# Altium PCB Air_PCB.PcbDoc
Units mil, origin at the board's own origin, x right, y up, seen from the top; angles counter-clockwise.
Board outline 824 x 961 mil, 4 copper layers (TopLayer, 3V3, 1V8, Bottom Layer), stack 23.712 mil thick; 12 components, 6 nets, 39 pads, 15 vias.
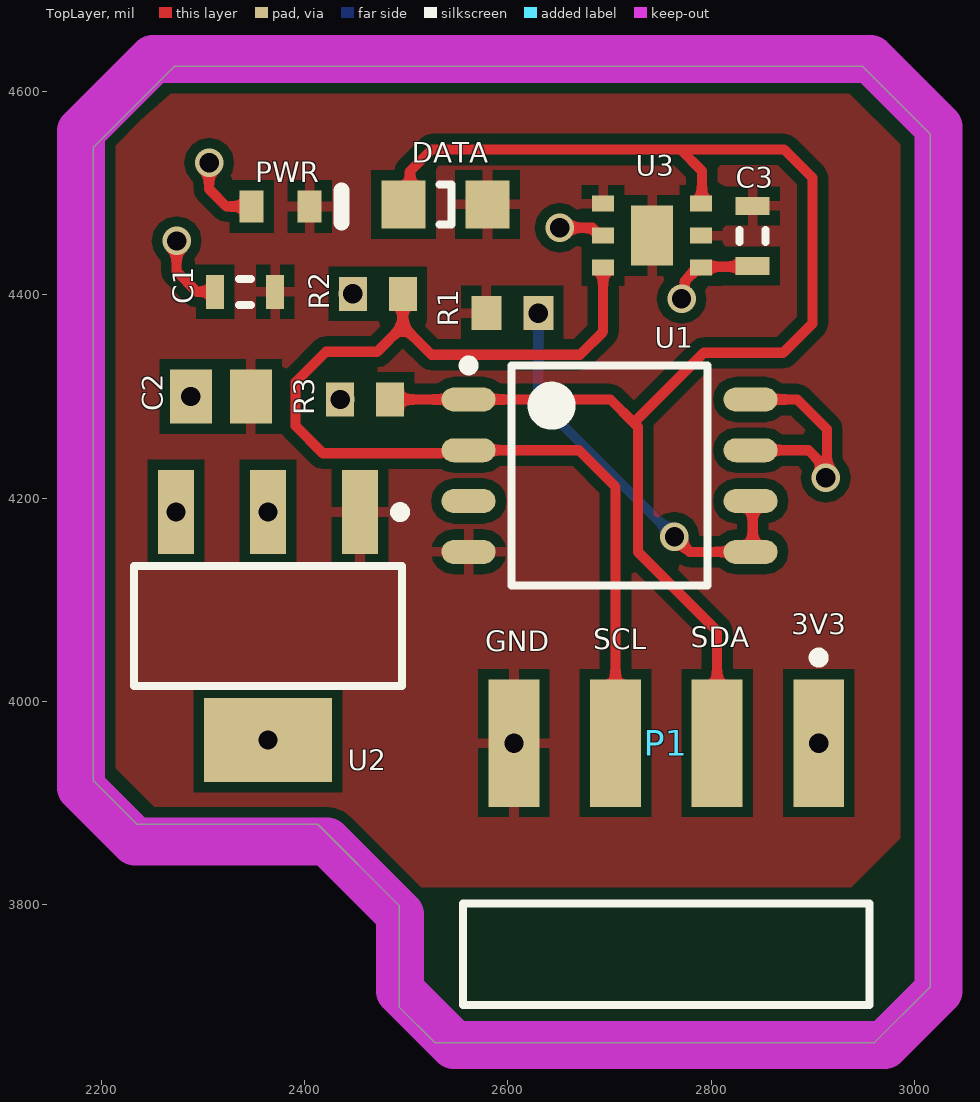
[diagram p0: TopLayer view]
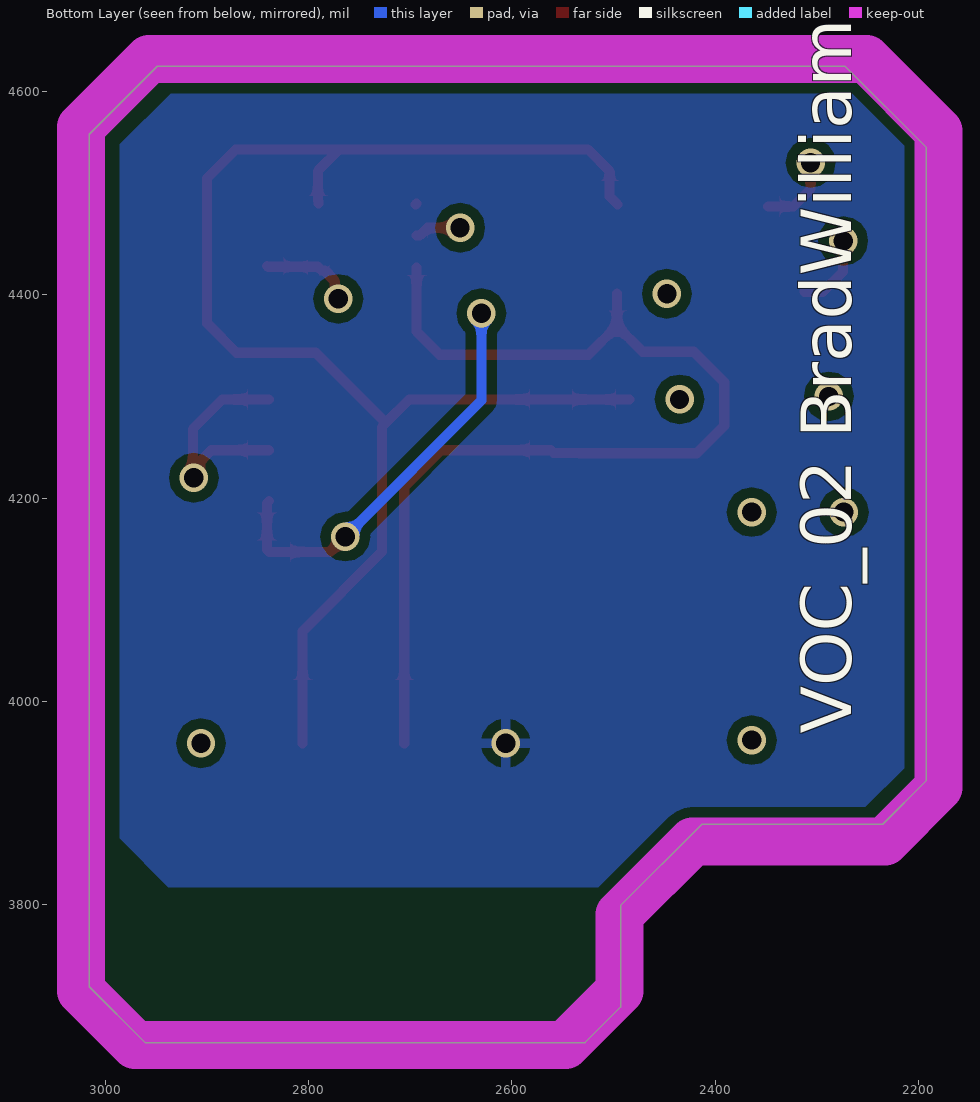
[diagram p1: Bottom Layer view, seen from below]
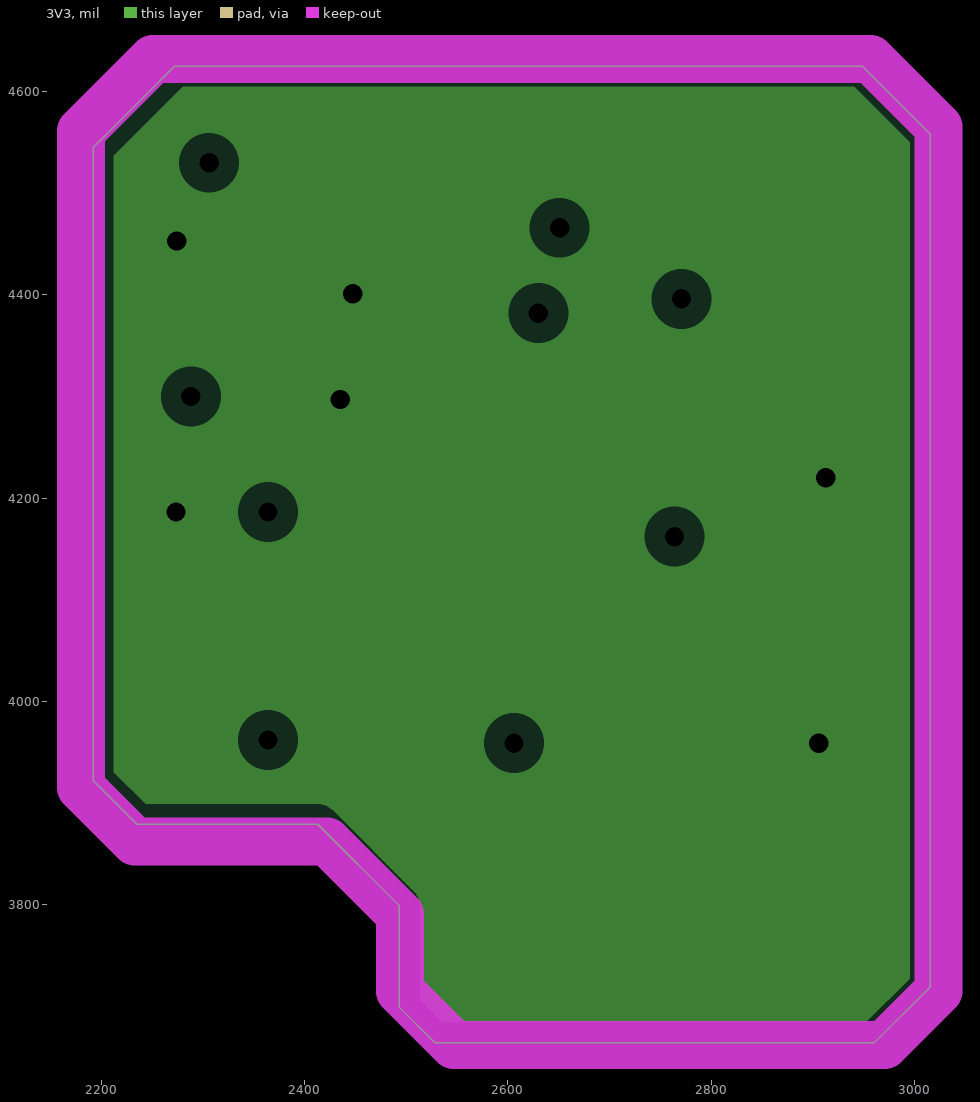
[diagram p2: 3V3, clearances drawn from the general rule]
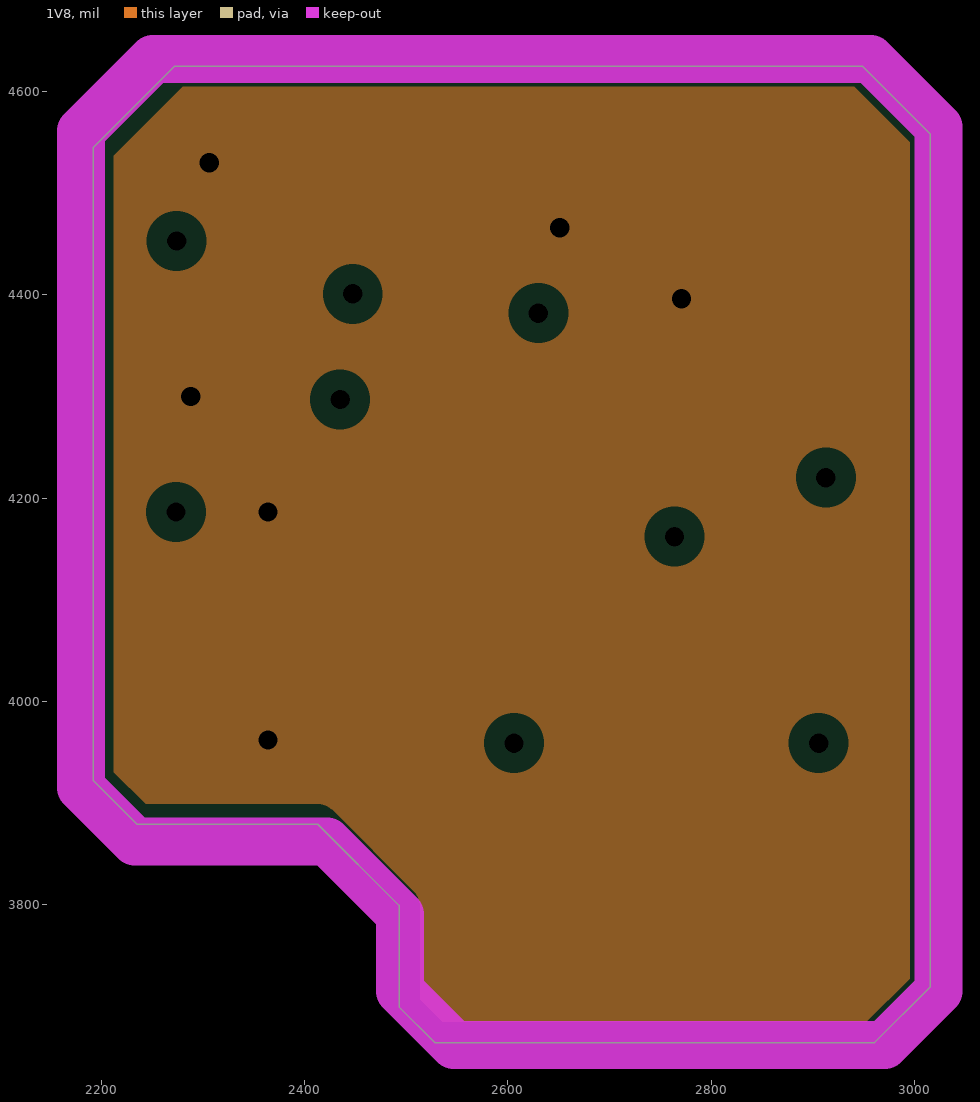
[diagram p3: 1V8, clearances drawn from the general rule]

## Layer stack, top to bottom
Top Solder: solder mask 0.4, Solder Resist, Dk 3.5
TopLayer: signal copper 1.378
Dielectric2: dielectric 12.6, FR-4, Dk 4.8
3V3: plane copper 1.378, net 3V3
Dielectric 3: prepreg 2.8, PP-006, Dk 4.1
1V8: plane copper 1.378, net 1V8
Dielectric 2: prepreg 2.8, PP-006, Dk 4.1
Bottom Layer: signal copper 1.378
Bottom Solder: solder mask 0.4, Solder Resist, Dk 3.5

## Board outline
3016,3719 2961,3664 2528,3664 2493,3699 2493,3799 2413,3879 2235,3879 2192,3922 2192,4545 2272,4625 2949,4625 3016,4558

## Design rules (kind name [scope] priority, off if disabled: settings)
Clearance Clearance_5 [All] p1: gap=10 ignorepadtopadclearanceinfootprint=FALSE except(0: Arc-Hole Track-Hole SMDPad-Hole THPad-Hole Via-Hole Fill-Hole Poly-Hole Region-Hole Text-Hole)
Clearance Clearance_4 [All] p2 off: gap=10 ignorepadtopadclearanceinfootprint=FALSE except(0: Arc-Hole Track-Hole SMDPad-Hole THPad-Hole Via-Hole Fill-Hole Poly-Hole Region-Hole Text-Hole)
Clearance Clearance_3 [All] p3 off: gap=10 ignorepadtopadclearanceinfootprint=FALSE except(0: Arc-Hole Track-Hole SMDPad-Hole THPad-Hole Via-Hole Fill-Hole Poly-Hole Region-Hole Text-Hole)
Clearance [All] p4 off: gap=10 ignorepadtopadclearanceinfootprint=FALSE except(0: Arc-Hole Track-Hole SMDPad-Hole THPad-Hole Via-Hole Fill-Hole Poly-Hole Region-Hole Text-Hole)
Clearance Clearance_2 [All] p5 off: gap=10 ignorepadtopadclearanceinfootprint=FALSE except(0: Arc-Hole Track-Hole SMDPad-Hole THPad-Hole Via-Hole Fill-Hole Poly-Hole Region-Hole Text-Hole; 8: Arc-Arc Arc-Track Track-Track)
Clearance Clearance_1 [All] p6 off: gap=10 ignorepadtopadclearanceinfootprint=FALSE except(0: Arc-Hole Track-Hole SMDPad-Hole THPad-Hole Via-Hole Fill-Hole Poly-Hole Region-Hole Text-Hole)
ComponentClearance [All] p1 off: gap=10 collisioncheckmode=3 verticalgap=10 showdistances=FALSE
MinimumSolderMaskSliver [All] p1: minsoldermaskwidth=0
PlaneClearance [All] p1: clearance=20
PlaneConnect [All] p1: planeconnectstyle=Relief reliefexpansion=20 reliefentries=4 reliefconductorwidth=10 reliefairgap=10
PolygonConnect [All] p1: connectstyle=Relief reliefconductorwidth=10 reliefentries=4 polygonreliefangle="90 Angle" airgapwidth=10
RoutingVias [All] p1: holewidth=19 width=29 viastyle="Through Hole" minholewidth=8 minwidth=20 maxholewidth=19 maxwidth=29
ShortCircuit ShortCircuit_1 [All] p1: allowed=FALSE
ShortCircuit [All] p2: allowed=FALSE
SilkToSolderMaskClearance [IsPad] p1: minsilkscreentomaskgap=0 clearancetoexposedcopper=TRUE
SolderMaskExpansion [All] p1: expansion=2 istentingtop=FALSE
Width [All] p1: maxlimit=10 minlimit=10 preferedwidth=10
24 further rules are at their usual default settings.

## Components (designator, comment, footprint, x,y, rotation, side; value= is the part's Value field where it differs from the comment)
C1 "CGA3E2X7R1H104K080AA" CAPC1608X90X20LL10 2341.47,4403 r180 top
C2 "GCM21BR70J106KE22L" CAPC2013X140X45LL15T25 2317.53,4300 r180 top
C3 "CGA3E2X7R1H104K080AA" CAPC1608X90X20LL10 2841,4458 r270 top
DATA "150080BS75000" 0805_A 2538.68,4489 r180 top
P1 "TSM-104-01-L-SH" SMTC-TSM-104-01-X-SH 2756,3746 r180 top
PWR "TLMS1000-GS08" VISH-TLMS1000_V 2376.46,4487 r0 top
R1 "ERJ3EKF1002V" RESC1609X55X30LL15T15 2604.41,4382 r180 top
R2 "ERJ-3EKF1001V" RESC1608X55X30LL15T15 2472,4401 r0 top
R3 "ERJ-3EKF1001V" RESC1608X55X30LL15T15 2459.61,4297 r0 top
U1 "DS1621V+" MAXM-W8+2_L 2700.22,4222 r0 top
U2 "LD1117AS18TR" SOT-223_L 2364,4074 r270 top
U3 "SGP30" SGP30 2742,4458.28 r180 top

## Footprints (in the part's own frame and the unit in brackets; to place one, negate y for a bottom-side part, rotate by r counter-clockwise, add the part's x,y. Pads: shape width x height; smd on the part's side, far side on the other; paste and mask are expansions set on the pad)
0805_A [mm] "Chip LED, 2-Leads, Body 2.0x1.3mm, IPC Medium Density"
  rect 1.1x1.2 smd: 1(-1.05,0) 2(1.05,0)
  silkscreen extent -0.15,-0.5 0.15,0.5, body extent -1,-0.62 1,0.63, height 0.68
CAPC1608X90X20LL10 [mm] "Chip Capacitor, 2-Leads, Body 1.70x0.90mm, IPC High Density"
  rect 0.45x0.85 smd: 1(-0.75,0) 2(0.75,0)
  silkscreen extent -0.15,-0.33 0.15,0.33, body extent -0.85,-0.45 0.85,0.45, height 0.9
CAPC2013X140X45LL15T25 [mm] "Chip Capacitor, 2-Leads, Body 2.00x1.25mm, IPC High Density"
  rect 1.05x1.35 smd: 1(-0.75,0) 2(0.75,0)
  body extent -1.08,-0.7 1.07,0.7, height 1.4
MAXM-W8+2_L [mm] "SOIC, 8-Leads, Body 5.31x5.285mm, Pitch 1.27mm, IPC High Density"
  oval 1.35x0.6 smd: 1(-3.525,1.905) 2(-3.525,0.635) 3(-3.525,-0.635) 4(-3.525,-1.905) 5(3.525,-1.905) 6(3.525,-0.635) 7(3.525,0.635) 8(3.525,1.905)
  silkscreen extent -3.65,-2.75 2.45,2.88, body extent -2.7,-2.75 2.7,2.75, height 2.13
RESC1608X55X30LL15T15 [mm] "Chip Resistor, 2-Leads, Body 1.60x0.80mm, IPC High Density"
  rect 0.7x0.85 smd: 1(-0.625,0) 2(0.625,0)
  body extent -0.87,-0.48 0.87,0.48, height 0.55
RESC1609X55X30LL15T15 [mm] "Chip Resistor, 2-Leads, Body 1.75x0.95mm, IPC High Density"
  rect 0.75x0.85 smd: 1(-0.65,0) 2(0.65,0)
  body extent -0.87,-0.48 0.87,0.48, height 0.55
SGP30 [mil] "SGP30"
  rect 21.65x15.75 smd: 1(-48.23,31.5) 2(-48.23,0) 3(-48.23,-31.5) 4(48.23,-31.5) 5(48.23,0) 6(48.23,31.5)
  rect 41.34x59.06 smd: GND(0,0)
  body extent -74,-53 61,74, height 50
SMTC-TSM-104-01-X-SH [mm] "Terminal Strip Single Surface Mount, 1x4 Pins, Horizontal, 2.54mm Pitch, Male"
  rect 1.27x3.18 smd: 1(-3.81,-5.402) 2(-1.27,-5.402) 3(1.27,-5.402) 4(3.81,-5.402)
  silkscreen extent -5.08,-7.67 5.08,1.15, body extent -5.08,-5.96 5.08,6.99, height 3.05
SOT-223_L [mm] "SOT223, 4-Leads, Body 6.5x3.5mm, Pitch 2.3mm, Lead Span 7mm, IPC High Density"
  rect 2.1x0.9 smd: 1(-2.85,2.3) 2(-2.85,0) 3(-2.85,-2.3)
  rect 2.1x3.2 smd: 4(2.85,0)
  silkscreen extent -2.97,-3.35 1.5,3.43, body extent -1.85,-3.35 1.85,3.35, height 1.8
VISH-TLMS1000_V [mm] "SMD, 2-Leads, Body 0.8x1.6mm"
  rect 0.6x0.8 smd: 1(-0.725,0) 2(0.725,0)
  silkscreen extent 1.52,-0.4 1.52,0.4, body extent -0.8,-0.4 0.8,0.4, height 0.65

## Part data
C1 C3: library part CMP-2000-07546-1, "Chip Capacitor, 0.1 uF, +/- 10%, 50 V, -55 to 125 degC, 0603 (1608 Metric), RoHS, Tape and Reel", Capacitance=100nF, Case Code (Imperial)=0603, Case Code (Metric)=1608, Dielectric=X7R, Manufacturer=TDK, Max Operating Temperature=125degC, Min Operating Temperature=-55degC, Package Description="2-Pin Surface Mount Device, Body 1.6 x 0.8 mm", Package Quantity=1, Package Reference=603, Tolerance=10%, Voltage=50V, Case/Package=0603, Composition=Ceramic, Datasheet URL=https://product.tdk.com/info/en/catalog/datasheets/mlcc_automotive_general_en.pdf, Datasheet Version=12/2014, Depth=0.8mm, Height=0.8mm, Lead Free=LeadFree, Length=1.6mm, Manufacturer URL=http://www.tdk.com/, Mount=SurfaceMount, Mounting Technology=SurfaceMount, Packaging=TapeandReel, Radiation Hardening=No, REACH SVHC=NoSVHC, RoHSCompliant=True, Termination=SMD/SMT, Thickness=0.035inch, Voltage Rating=50V, Voltage Rating (DC)=50V, Weight=7.1E-05oz, Width=0.8mm
C2: library part CMP-2007-03335-1, Manufacturer=Murata, Part Number=GCM21BR70J106KE22L
DATA: library part CMP-1426-00008-1, "SMD mono-color Chip LED, WL-SMCW, Blue", Color=Blue, Manufacturer="Wuerth Elektronik", ComponentLink1Description="Manufacturer URL", ComponentLink1URL=http://www.we-online.com, ComponentLink2Description=Datasheet, ComponentLink2URL=http://katalog.we-online.com/led/datasheet/150080BS75000.pdf, PackageReference=0805_A, PartNumber=150080BS75000
P1: library part CMP-1024-00225-1, "0.025\" SQ Post Header, Surface Mount, Horizontal, -55 to 125 degC, 2.54 mm Pitch, 4-Pin, Male, RoHS", Manufacturer=Samtec, Temperature Range="-55 to 125 degC", ComponentLink1Description="Manufacturer URL", ComponentLink1URL=http://www.samtec.com, ComponentLink2Description=Datasheet, ComponentLink2URL=http://www.samtec.com/documents/webfiles/pdf/TSM.PDF, ComponentLink3Description="Package Specification", ComponentLink3URL=http://www.samtec.com/documents/webfiles/cpdf/TSM-1XX-XX-XXX-SH-XX-XXX-XX-MKT1.pdf, DatasheetVersion=F-214, Mounting Technology="Surface Mount", Orientation=Horizontal, PackageDescription="Terminal Strip Single Surface Mount", PackageReference=TSM-104-01-X-SH, PackageVersion="CD, 7/1991", PartNumber=TSM-104-01-L-SH, Pitch="2.54 mm", RoHS=True
PWR: library part CMP-2000-07254-1, "Low Current LED, 40 mW, 1.8 V, -40 to 100 degC, 2-Pin SMD (0603), RoHS, Tape and Reel", Forward Current If=2mA, Forward Voltage=1.8V, LED Colour=Red, Manufacturer=Vishay, Package Description="2-Pin Surface Mount Device, Body 1.6 x 0.8 mm", Package Reference=TLMS1000, Automotive Qualification Standard=AEC-Q100, Bulb Size=1.6mmx0.8mm, Datasheet URL=https://datasheet.ciiva.com/5798/1698881-5798337.pdf, Datasheet Version="Rev. 1.7, 02/2011", LED Mounting=SMD, Lens Shape=Rectangular, Luminous Intensity=4mcd, Manufacturer URL=http://www.vishay.com/, Mounting Technology=SurfaceMount, MSL=MSL2-1year, Packaging=CutTape, Product Range=-, SVHC=ToBeAdvised, Viewing Angle=80°, Wavelength Typ=636nm
R1: library part CMP-2000-07452-1, "Chip Resistor, 10 KOhm, +/- 1%, 0.1 W, -55 to 155 degC, 0603 (1608 Metric), RoHS, Tape and Reel", Case Code (Imperial)=0603, Case Code (Metric)=1608, Manufacturer=Panasonic, Max Operating Temperature=155degC, Max Power Dissipation=100mW, Min Operating Temperature=-55degC, Package Description="2-Pin Surface Mount Device, Body 1.6 x 0.85 mm", Package Quantity=1, Package Reference=603, Resistance=10KOhm, Temperature Coefficient=100ppm\/degreesC, Tolerance=1%, Voltage Rating=75V, Case\/Package=0603, Composition=ThickFilm, Contact Plating=Tin, Datasheet URL=https://industrial.panasonic.com/cdbs/www-data/pdf/RDA0000/AOA0000C304.pdf, Datasheet Version=02/2017, Depth=0.8mm, Height=0.45mm, Lead Free=LeadFree, Length=1.6mm, Manufacturer URL=http://www.panasonic.com/, Military Standard=Not, Mount=SurfaceMount, Mounting Technology=SurfaceMount, Number of Pins=2, Number of Terminations=2, Packaging=TapeandReel, Power Rating=100mW, Radiation Hardening=No, REACH SVHC=NoSVHC, RoHSCompliant=true, Termination=SMD/SMT, Voltage Rating (DC)=75V, Width=0.031inch
R2 R3: library part CMP-2000-00180-1, Manufacturer=Panasonic, Part Number=ERJ-3EKF1001V
U1: library part CMP-0253-01131-1, "2-wire 0.5 degC Accurate Temperature Sensor and Thermostat, 9 to 12 Bits Temperature Resolution, -55 to 125 degC, 8-Pin SOIC (W8+2), Pb-Free", Generic Part Number=DS1621, ComponentLink1Description="Manufacturer URL", ComponentLink1URL=http://www.maximintegrated.com/, ComponentLink2Description=Datasheet, ComponentLink2URL=http://datasheets.maximintegrated.com/en/ds/DS1621.pdf, ComponentLink3Description="Package Specification", ComponentLink3URL=http://pdfserv.maximintegrated.com/package_dwgs/21-0262.PDF, DatasheetVersion="Rev. 3", Functions="Single Temperature Alarm", Interface=2-Wire/I2C/SMBus, Mounting Technology="Surface Mount", Multi Droppable=Yes, PackageDescription="8-Pin Small-Outline IC, Body 5.285 x 5.31 mm, Pitch 1.27 mm", PackageReference=W8+2, PackageVersion="Rev. B, 01/2010", Parasite Pwr.=No, PartNumber=DS1621V+
U2: library part CMP-0244-00319-1, "1A, Low Drop Positive Voltage Regulator, 1.8V, 4-Pin SOT-223, Tape and Reel", ComponentLink1Description="Manufacturer URL", ComponentLink1URL=http://www.st.com, ComponentLink2Description=Datasheet, ComponentLink2URL=http://www.st.com/internet/com/TECHNICAL_RESOURCES/TECHNICAL_LITERATURE/DATASHEET/CD00002116.pdf, DatasheetVersion=2/12/2011, PackageDescription="4-Pin SOT-223 Package, 6.5 x 3.5 mm Body, 2.3 mm Pitch, 7 mm Lead Span", PackageReference=SOT-223, PackageVersion=2010
U3: library part CMP-011-0000-1, "AIR QUALITY GAS SENSOR FOR VOC'S", Package=None, Availability=Unavailable, Component Type=Standard, Design Item ID=SGP30, MF="Sensirion AG", MP=SGP30, Pin Count=7, Price=None, SnapEDA_Link=https://www.snapeda.com/parts/SGP30/Sensirion%20AG/view-part/1413307/?ref=snap, Source=SnapEDAsch.SchLib

## Via types
v1: diameter 28, hole 19, TopLayer to Bottom Layer, 15 vias

## Nets (pads, with @x,y where several pads share a name; then routed paths per layer and width w, separated by ;. In a path a pad name is that pad's centre, name@x,y a point inside that pad or via, vN(x,y) a via of type N, cw(c..) or ccw(c..) an arc to the next point about the centre after c; other vN are vias at no path point)
1V8: C2.2 C3.2 PWR.1 U2.2 U2.4 U3.1 U3.5 | length 212.9
  TopLayer w10: v1(2306,4530) 2306,4504 2323,4487 PWR.1 ; v1(2651,4466) 2683.1,4466 2690.82,4458.28 U3.5 ; v1(2771,4396) 2774.44,4399.44 2774.44,4413.95 2784.41,4423.91 2787.36,4423.91 U3.1 2791.07,4427.63 2840.16,4427.63 C3.2
  other v1: 2364,3961.8 2364,4186.21 2288,4300
3V3: C1.2 P1.1 R2.1 R3.1 U1.7 U1.8 U2.3 | length 292.3
  TopLayer w10: v1(2274,4453) 2274,4423 2293.94,4403.06 2311.89,4403.06 C1.2 ; U1.7 2896,4247 2913,4230 v1(2913,4220) ; U1.8 2885,4297 2914,4268 v1@2914,4230
  other v1: 2906,3958.69 2273.45,4186.21 2435,4297 2447.39,4401
GND: C1.1 C2.1 C3.1 DATA.1 P1.4 PWR.2 R1.2 U1.4 U2.1 U3.2 U3.4 U3.GND | length 1.1
  TopLayer w10: U3.4 U3.4@2694.55,4489
  other v1: 2606,3958.69
NetR1_1: R1.1 U1.5 U1.6 | length 408.4
  TopLayer w10: v1(2764,4162) 2779,4147 U1.5 2841,4149 2841,4195 U1.6
  Bottom Layer w10: v1(2630,4382) 2630,4296 v1(2764,4162)
SCL: P1.3 R2.2 U1.2 U3.6 | length 1079.2
  TopLayer w10: R2.2 2496.61,4369.27 ; U3.6 2693.77,4363.77 2671,4341 2524.87,4341 2496.61,4369.27 ; P1.3 2706,4211 2670,4247 U1.2 2558.83,4244.39 2534.44,4244.39 2534.04,4244 2418,4244 2391,4271 2391,4314 2421,4344 2471.34,4344 2496.61,4369.27
SDA: DATA.2 P1.2 R3.2 U1.1 U3.3 | length 1473.2
  TopLayer w10: R3.2 U1.1 2701,4297 2724,4274 ; DATA.2@2496,4489 2503.76,4496.76 2503.76,4521.76 2525,4543 2770,4543 ; U3.3 2790.23,4491.89 2791,4492.66 2791,4522 2769.93,4543.07 2871.93,4543.07 2900,4515 2900,4372 2871,4343 2793,4343 2724,4274 ; P1.2 2806,4069 2728,4147 2728,4270 2724,4274
pads on no net: U1.3

## Polygon pours and split planes (outlines as drawn)
GND on Bottom Layer "GND_L04_P056" (solid, remove dead copper, pour order 56): 2512,3817 2938,3817 2986,3865 2986,4548 2936,4598 2262,4598 2211,4547 2211,3937 2256,3892 2437,3892
GND on TopLayer "GND_L01_P051" (solid, remove dead copper, pour order 51): 2268,4598 2936,4598 2986,4548 2986,3865 2938,3817 2512,3817 2437,3892 2256,3892 2211,3937 2211,4547
3V3 on 3V3 (split plane): 2940.68,4604.9 2995.9,4549.68 2995.9,3727.32 2952.68,3684.1 2536.32,3684.1 2513.1,3707.32 2513.1,3799 2513.06,3799.39 2512.71,3802.92 2511.91,3805.55 2511.57,3806.69 2509.71,3810.17 2507.46,3812.91 2507.21,3813.21 2427.21,3893.21 2424.17,3895.71 2420.69,3897.57 2416.92,3898.71 2413,3899.1 2243.32,3899.1 2212.1,3930.32 2212.1,4536.68 2280.32,4604.9
1V8 on 1V8 (split plane): 2940.68,4604.9 2995.9,4549.68 2995.9,3727.32 2952.68,3684.1 2536.32,3684.1 2513.1,3707.32 2513.1,3799 2513.06,3799.39 2512.71,3802.92 2511.91,3805.55 2511.57,3806.69 2509.71,3810.17 2507.46,3812.91 2507.21,3813.21 2427.21,3893.21 2424.17,3895.71 2420.69,3897.57 2416.92,3898.71 2413,3899.1 2243.32,3899.1 2212.1,3930.32 2212.1,4536.68 2280.32,4604.9

## Keep-outs
Keep-Out Layer:
  lines w47.24: 2180,3915 2233,3862 2422,3862 2494,3790 2494,3715 2547.14,3661.86 2970.86,3661.86 3024,3715 3024,4565 2957,4632 2251,4632 2180,4561 2180,3915

## Silkscreen, mask and mechanical layers (free items; w line width, h text height)
Top Overlay:
  text "3V3" at 2879,4066 h20
  text "SDA" at 2780,4053 h20
  text "SCL" at 2684,4051 h20
  text "GND" at 2578,4049 h20
Bottom Overlay:
  text "VOC_02 BradWilliams" at 2266,3968 h50 r270